# Altium PCB Yukitora_Mezanine.PcbDoc (part 1 of 2)
Units mm, origin at the board's own origin, x right, y up, seen from the top; angles counter-clockwise.
Board outline 67.05 x 88.93 mm, 2 copper layers (Top Layer, Bottom Layer); 83 components, 77 nets, 528 pads, 27 vias.
Unrouted connection lines stored in the file: 137.
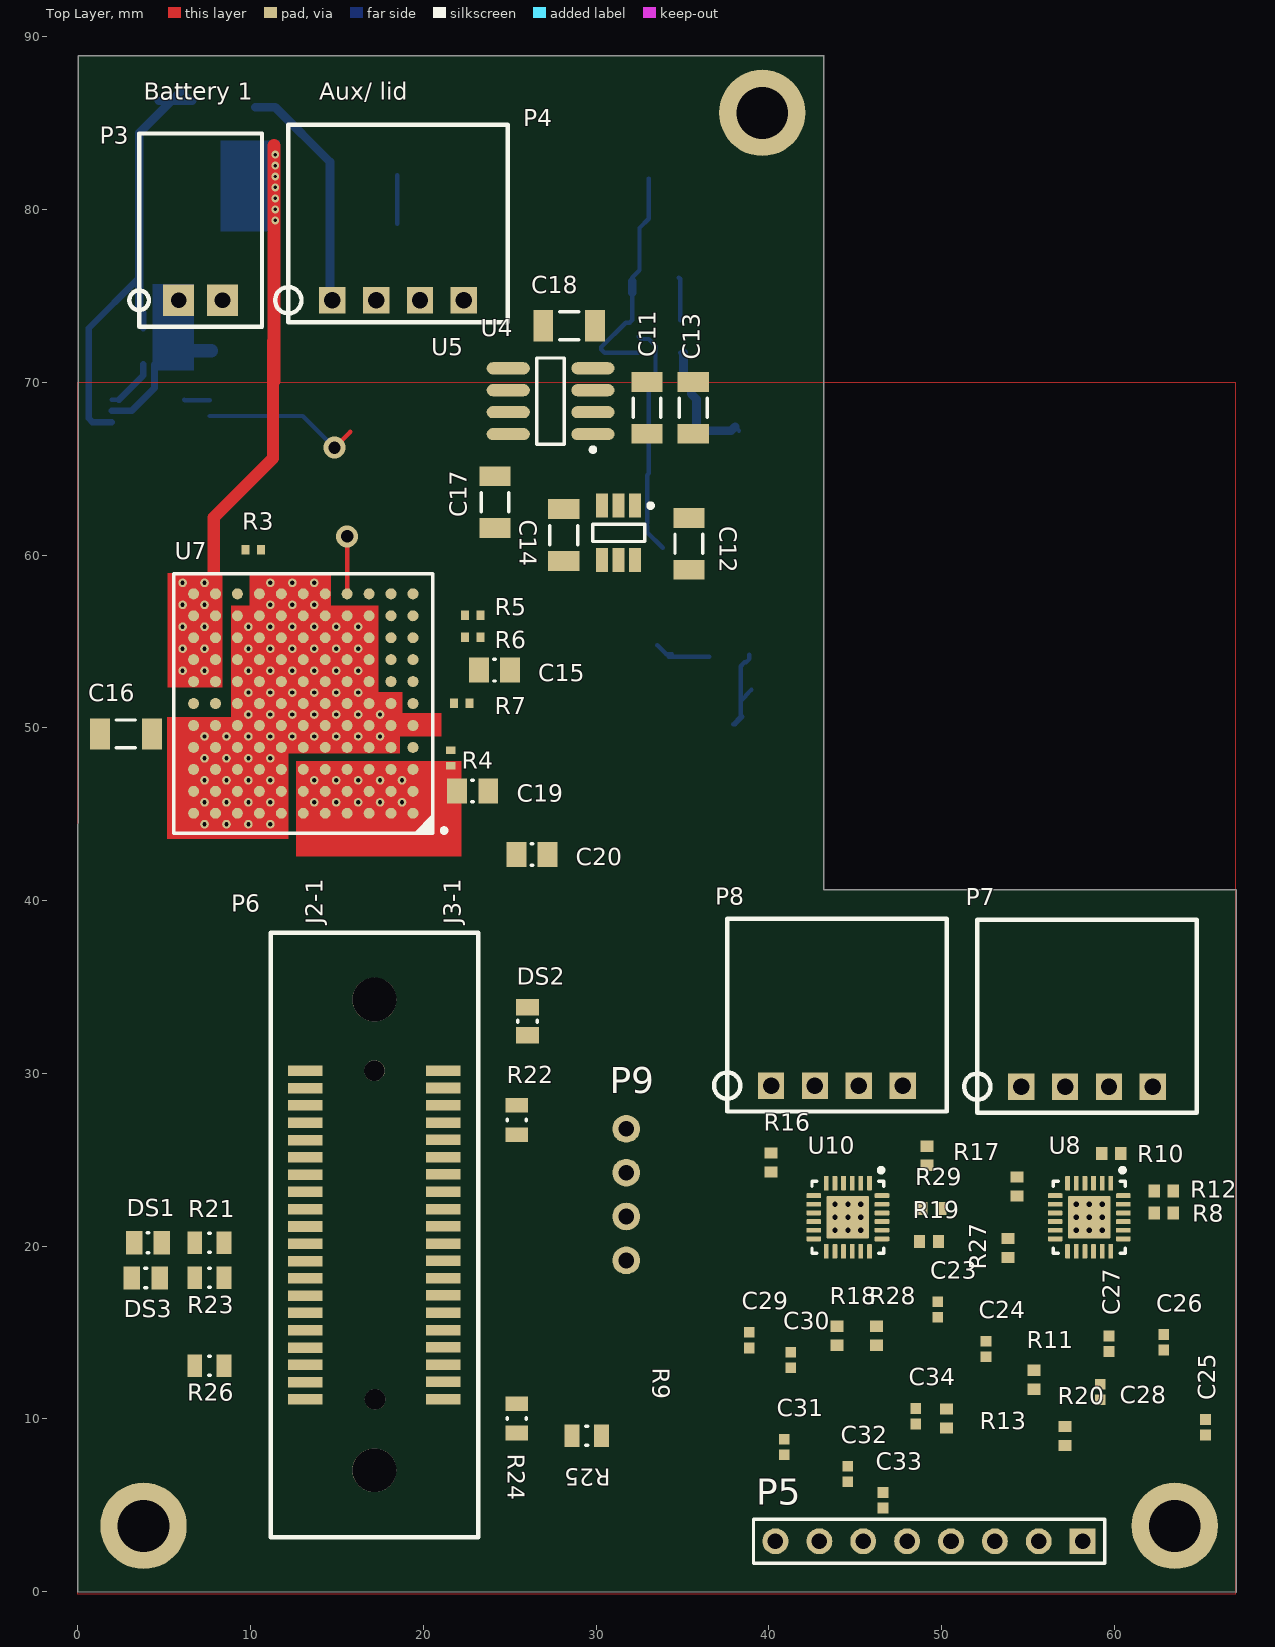
[diagram p0: Top Layer view]
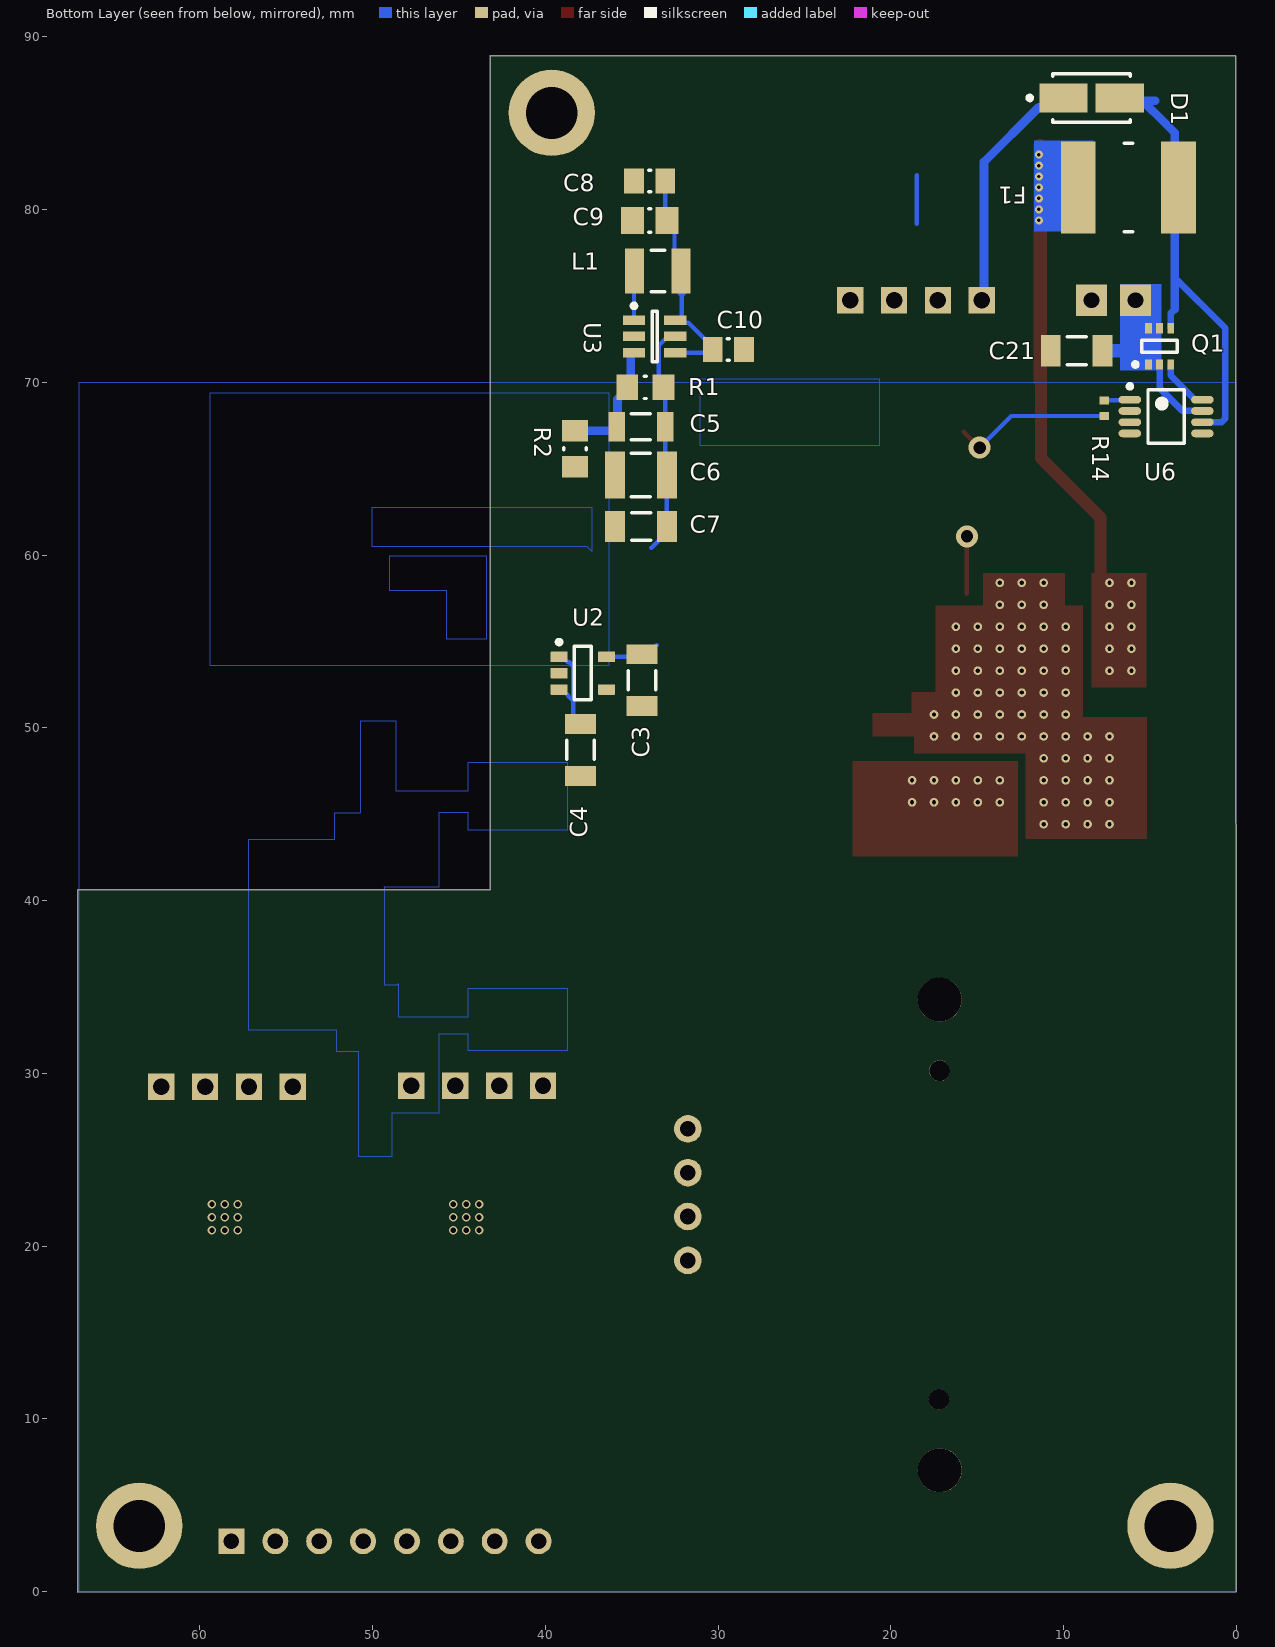
[diagram p1: Bottom Layer view, seen from below]

## Layer stack, top to bottom
Top Solder: solder mask 0.0102, Solder Resist, Dk 3.5
Top Layer: signal copper 0.0356
Dielectric 1: dielectric 0.32, FR-4, Dk 4.8
Bottom Layer: signal copper 0.0356
Bottom Solder: solder mask 0.0102, Solder Resist, Dk 3.5

## Board outline
43.18,88.9 43.18,40.64 67.056,40.64 67.056,-0.025 0.007,0 0.039,88.899

## Design rules (kind name [scope] priority, off if disabled: settings)
Clearance Clearance_2 [InNamedPolygon('NONET_L02_P014')] p1: gap=0.076 ignorepadtopadclearanceinfootprint=FALSE except(0: Arc-Hole Track-Hole SMDPad-Hole THPad-Hole Via-Hole Fill-Hole Poly-Hole Region-Hole Text-Hole; 0.254: Arc-Text Track-Text SMDPad-Text THPad-Text Via-Text Fill-Text Poly-Text Region-Text Text-Text)
Clearance Clearance_1 [InNamedPolygon('NONET_L01_P002')] p2: gap=0.127 ignorepadtopadclearanceinfootprint=FALSE
Clearance [All] p3: gap=0.2 ignorepadtopadclearanceinfootprint=TRUE except(0.1: SMDPad-SMDPad)
HoleSize [All] p1: absolutevalues=TRUE maxlimit=5 minlimit=0.025 maxpercent=80.000 minpercent=20.000
MinimumSolderMaskSliver [All] p1: minsoldermaskwidth=0.037
PlaneConnect [All] p1: planeconnectstyle=Direct reliefexpansion=0.508 reliefentries=4 reliefconductorwidth=0.254 reliefairgap=0.254
PolygonConnect [All] p1: connectstyle=Relief reliefconductorwidth=0.254 reliefentries=4 polygonreliefangle="90 Angle" airgapwidth=0.254
RoomDefinition 36V_Supply [InComponentClass('36V_Supply')] p1: confinementstyle=ConfineIn formatcopy=TRUE lockcomponents=FALSE outline 40.831,58.539 40.831,84.066 26.324,84.066 26.324,58.539
RoomDefinition "Stepper Motor Driver" [InComponentClass('Stepper Motor Driver')] p2: confinementstyle=ConfineIn formatcopy=TRUE lockcomponents=FALSE outline 32.004,-0.127 67.056,-0.127 67.056,41.681 32.004,41.681
RoomDefinition Bluetooth [InComponentClass('Bluetooth')] p3: confinementstyle=ConfineIn formatcopy=TRUE lockcomponents=FALSE outline 0.381,0 31.115,0 31.115,45.72 0.381,45.72
RoomDefinition 5V_Supply_Alt_1 [InComponentClass('5V_Supply_Alt_1')] p4: confinementstyle=ConfineIn formatcopy=TRUE lockcomponents=FALSE outline 19.841,56.845 40.579,56.845 40.579,77.292 19.841,77.292
RoutingVias [All] p1: holewidth=0.711 width=1.27 viastyle="Through Hole" minholewidth=0.711 minwidth=1.27 maxholewidth=0.711 maxwidth=1.27
SilkToSilkClearance [All] p1: silktosilkclearance=0.2
SilkToSolderMaskClearance [IsPad] p1: minsilkscreentomaskgap=0.175 clearancetoexposedcopper=TRUE
SolderMaskExpansion [All] p1: expansion=0.102
Width [All] p1: maxlimit=1 minlimit=0.127 preferedwidth=0.254
25 further rules are at their usual default settings.

## Classes and differential pairs
component class "Stepper Motor Driver": C23 C24 C25 C26 C27 C28 C29 C30 C31 C32 C33 C34 P7 P8 R8 R9 R10 R11 R12 R13 R16 R17 R18 R19 R20 R27 R28 R29 U8 U10
component class Bluetooth: DS1 DS2 DS3 P6 R21 R22 R23 R24 R25 R26
component class 12_Supply: C15 C19 C20 R3 R4 R5 R6 R7 U7
component class 5V_Supply_Alt_1: C11 C12 C13 C14 C17 C18 U4 U5
component class Power_Input_FET: C16 C21 D1 F1 P3 P4 Q1 R14 RL2 RL? U6
component class 36V_Supply: C5 C6 C7 C8 C9 C10 L1 R1 R2 U3
component class Connectors: C3 C4 P1 P2 P5 P9 U2

## Components (designator, comment, footprint, x,y, rotation, side; value= is the part's Value field where it differs from the comment)
C3 "CAP CER 1UF 50V X7R 1210" CAPC1206(3216)130_N 34.398,52.762 r90 bottom
C4 "CAP CER 1UF 50V X7R 1210" CAPC1206(3216)130_N 37.954,48.722 r90 bottom
C5 "22pF" CAPC1206(3216)170_L 34.463,67.429 r180 bottom
C6 "CAP CER 1UF 50V X7R 1210" CAPC1210(3225)100_N 34.463,64.635 r180 bottom
C7 "CAP CER 0.47UF 50V X7R 1206" CAPC1206(3216)190_N 34.456,61.654 r180 bottom
C8 "CAP CER 1UF 16V X7R 0805" CAPC0805(2012)145_N 33.955,81.653 r180 bottom
C9 "4.7uF" CAPC0805(2012)145_M 33.955,79.367 r180 bottom
C10 "CAP CER 0.047UF 16V X7R 0603" CAPC0805(2012)145_N 29.407,71.899 r0 bottom
C11 "CAP CER 10UF 6.3V X5R 1206" CAPC1206(3216)130_N 32.959,68.529 r270 top
C12 "CAP CER 10UF 6.3V X5R 1206" CAPC1206(3216)130_N 35.372,60.655 r90 top
C13 "CAP CER 1UF 50V X7R 1210" CAPC1206(3216)130_N 35.626,68.529 r270 top
C14 "CAP CER 1UF 10V X5R 0805" CAPC1206(3216)130_N 28.133,61.163 r90 top
C15 "CAP CER 0.1UF 16V X7R 0805" CAPC0805(2012)145_N 24.13,53.34 r0 top
C16 "CAP CER 10UF 6.3V X5R 1206" CAPC1206(3216)130_N 2.794,49.657 r180 top
C17 "1uF" CAPC1206(3216)130_N 24.159,63.068 r90 top
C18 "CAP CER 1UF 50V X7R 1210" CAPC1206(3216)130_N 28.448,73.279 r0 top
C19 "CAP CER 0.1UF 16V X7R 0805" CAPC0805(2012)145_N 22.86,46.355 r180 top
C20 "CAP CER 0.1UF 16V X7R 0805" CAPC0805(2012)145_N 26.289,42.672 r0 top
C21 "CAP CER 10UF 6.3V X5R 1206" CAPC1206(3216)130_N 9.246,71.831 r180 bottom
C23 ".01uF" CAPC0402(1005)60_N 49.784,16.341 r90 top
C24 "2.2uF" CAPC0402(1005)60_N 52.578,14.055 r90 top
C25 "10uF" CAPC0402(1005)60_N 65.278,9.525 r90 top
C26 ".01uF" CAPC0402(1005)60_N 62.865,14.436 r90 top
C27 ".01uF" CAPC0402(1005)60_N 59.69,14.351 r90 top
C28 "10uF" CAPC0402(1005)60_N 59.182,11.557 r90 top
C29 ".01uF" CAPC0402(1005)60_N 38.862,14.563 r90 top
C30 "2.2uF" CAPC0402(1005)60_N 41.275,13.42 r90 top
C31 "10uF" CAPC0402(1005)60_N 40.894,8.382 r90 top
C32 ".01uF" CAPC0402(1005)60_N 44.577,6.816 r90 top
C33 ".01uF" CAPC0402(1005)60_N 46.609,5.292 r90 top
C34 "10uF" CAPC0402(1005)60_N 48.514,10.16 r90 top
D1 "CDBA540-HF" VISH-DO-214AC-2_M 8.382,86.462 r180 bottom
DS1 "Lite-On LTST-S220KGKT Green LED, 571 nm 2012 (0805) Side View, Rectangle Lens SMD package" 0805C_L 4.064,20.193 r0 top
DS2 "Lite-On LTST-S220KGKT Green LED, 571 nm 2012 (0805) Side View, Rectangle Lens SMD package" 0805C_L 26.035,33.02 r90 top
DS3 "Lite-On LTST-S220KGKT Green LED, 571 nm 2012 (0805) Side View, Rectangle Lens SMD package" 0805C_L 3.937,18.161 r0 top
F1 "PCT" CAPC7451X12N 6.248,81.28 r0 bottom
L1 "47uH" C1210 33.481,76.454 r0 bottom
P1 "TLW-108-05-G-D" TLW-108-05-G-D 105.994,15.748 r90 top
P2 "TLW-108-05-G-D" TLW-108-05-G-D 116.027,13.132 r270 bottom
P3 "IPL1-102-01-F-S-RA-K" IPL1-102-01-F-S-RA-K 5.842,74.752 r0 top
P4 "IPL1-104-01-L-S-RA-K" IPL1-104-01-L-S-RA-K 14.732,74.752 r0 top
P5 "Header 8" HDR1X8 58.166,2.921 r180 top
P6 "FSI-120-03-G-D-E-AB" FSI-120-03-G-D-E-AB 17.17,20.65 r90 top
P7 "IPL1-104-01-L-S-RA-K" IPL1-104-01-L-S-RA-K 54.61,29.235 r0 top
P8 "IPL1-104-01-L-S-RA-K" IPL1-104-01-L-S-RA-K 40.132,29.295 r0 top
P9 "TLW-104-05-G-S" TLW-104-05-G-S 31.75,22.987 r90 top
Q1 "MCH6336-TL-E" ONSC-MCPH-6_V 4.445,72.085 r90 bottom
R1 "RES SMD 280K OHM 1% 1/8W 0805" RESC0805(2012)_M 34.209,69.715 r0 bottom
R2 "RES SMD 10K OHM 1% 1/8W 0805" RESC0805(2012)_M 38.273,66.159 r270 bottom
R3 "???" RESC0402(1005)_L 10.16,60.325 r0 top
R4 "???" RESC0402(1005)_L 21.59,48.26 r90 top
R5 "100k" RESC0402(1005)_L 22.86,56.515 r0 top
R6 "11k" RESC0402(1005)_L 22.86,55.245 r180 top
R7 "34k" RESC0402(1005)_L 22.225,51.435 r180 top
R8 "10k" RESC0402(1005)_M 62.865,21.929 r0 top
R9 "0.1R" RESC0402(1005)_M 54.356,23.453 r90 top
R10 "0.1R" RESC0402(1005)_M 59.817,25.358 r0 top
R11 "47K" RESC0402(1005)_M 55.347,12.268 r90 top
R12 "47K" RESC0402(1005)_M 62.865,23.199 r0 top
R13 "1" RESC0402(1005)_M 50.292,10.033 r270 top
R14 "560k" RESC0402(1005)_L 7.645,68.504 r270 bottom
R16 "0.1R" RESC0402(1005)_M 40.132,24.85 r90 top
R17 "0.1R" RESC0402(1005)_M 49.149,25.231 r90 top
R18 "47K" RESC0402(1005)_M 43.942,14.817 r90 top
R19 "47K" RESC0402(1005)_M 49.276,20.278 r180 top
R20 "1" RESC0402(1005)_M 57.15,9.017 r90 top
R21 "3.9k" RESC0805(2012)_L 7.62,20.193 r180 top
R22 "3.9k" RESC0805(2012)_L 25.4,27.305 r90 top
R23 "3.9k" RESC0805(2012)_L 7.62,18.161 r180 top
R24 "10K" RESC0805(2012)_L 25.4,10.033 r270 top value=3.9k
R25 "100" RESC0805(2012)_L 29.464,9.017 r180 top value=3.9k
R26 "100" RESC0805(2012)_L 7.62,13.081 r0 top value=3.9k
R27 "47K" RESC0402(1005)_M 53.848,19.897 r90 top
R28 "47K" RESC0402(1005)_M 46.228,14.817 r90 top
R29 "10K" RESC0402(1005)_M 49.403,22.183 r180 top
U2 "TLV70233DBVR" DBV0005A_N 37.827,53.167 r180 bottom
U3 "LT3461" LT-S6-6-TSOT-23_N 33.665,72.655 r180 bottom
U4 "LT1763CS8-5#PBF" LT-S8-8_M 27.371,68.91 r180 top
U5 "LTC1983ES6-5#TRMPBF" SOT95P323X100-6N 31.308,61.29 r270 top
U6 "LTC4414EMS8#TRPBF" LT-MS8-8_L 4.064,68.021 r180 bottom
U7 "LTM8055IY" LT-BGA-121-15000X15000X4920 13.056,51.41 r180 top
U8 "DRV8834RGER" RGE0024B_V 58.547,21.675 r270 top
U10 "DRV8834RGER" RGE0024B_V 44.577,21.675 r270 top

## Footprints (in the part's own frame and the unit in brackets; to place one, negate y for a bottom-side part, rotate by r counter-clockwise, add the part's x,y. Pads: shape width x height; smd on the part's side, far side on the other; paste and mask are expansions set on the pad)
0805C_L [mm]
  rect 0.95x1.35 smd: 1(-0.8,0) 2(0.8,0)
  silkscreen extent -0.05,-0.58 0.05,0.58, body extent -1.1,-0.72 1.1,0.72, height 0.75
C1210 [mm] "Chip Capacitor, Body 3.2x2.5mm, IPC High Density"
  rect 1.1x2.6 smd: 1(-1.35,0) 2(1.35,0)
  silkscreen extent -0.4,-1.2 0.4,1.2, body extent -1.7,-1.35 1.7,1.35, height 1.3
CAPC0402(1005)60_N [mm] "Chip Capacitor, Body 1.0x0.5mm, Height 0.6mm, IPC Medium Density"
  rect 0.62x0.62 smd: 1(-0.45,0) 2(0.45,0)
  body extent -0.55,-0.3 0.55,0.3, height 0.6
CAPC0805(2012)145_M [mm] "Chip Capacitor, Body 2.0x1.2mm, Height 1.45mm, IPC Low Density"
  rect 1.35x1.55 smd: 1(-1,0) 2(1,0)
  silkscreen extent -0.05,-0.67 0.05,0.68, body extent -1.1,-0.72 1.1,0.72, height 1.45
CAPC0805(2012)145_N [mm] "Chip Capacitor, Body 2.0x1.2mm, Height 1.45mm, IPC Medium Density"
  rect 1.15x1.45 smd: 1(-0.9,0) 2(0.9,0)
  silkscreen extent -0.05,-0.62 0.05,0.62, body extent -1.1,-0.72 1.1,0.73, height 1.45
CAPC1206(3216)130_N [mm] "Chip Capacitor, Body 3.2x1.6mm, Height 1.3mm, IPC Medium Density"
  rect 1.15x1.8 smd: 1(-1.5,0) 2(1.5,0)
  silkscreen extent -0.55,-0.8 0.55,0.8, body extent -1.7,-0.9 1.7,0.9, height 1.3
CAPC1206(3216)170_L [mm] "Chip Capacitor, Body 3.2x1.6mm, Height 1.7mm, IPC High Density"
  rect 0.95x1.7 smd: 1(-1.4,0) 2(1.4,0)
  silkscreen extent -0.55,-0.75 0.55,0.75, body extent -1.7,-0.9 1.7,0.9, height 1.7
CAPC1206(3216)190_N [mm] "Chip Capacitor, Body 3.2x1.6mm, Height 1.9mm, IPC Medium Density"
  rect 1.15x1.8 smd: 1(-1.5,0) 2(1.5,0)
  silkscreen extent -0.55,-0.8 0.55,0.8, body extent -1.7,-0.9 1.7,0.9, height 1.9
CAPC1210(3225)100_N [mm] "Chip Capacitor, Body 3.2x2.5mm, Height 1mm, IPC Medium Density"
  rect 1.15x2.7 smd: 1(-1.5,0) 2(1.5,0)
  silkscreen extent -0.55,-1.25 0.55,1.25, body extent -1.7,-1.35 1.7,1.35, height 1
CAPC7451X12N [mm] "Chip Capacitor, 2-Leads, Body 7.36x5.12mm, IPC Medium Density"
  rect 2x5.3 smd: 1(-2.9,0) 2(2.9,0)
  silkscreen extent -0.25,-2.55 0.25,2.55, body extent -3.99,-2.72 3.99,2.72, height 1.25
DBV0005A_N [mm] "SOT23, 5-Leads, Body 3.05x1.75mm, Pitch 0.95mm, IPC Medium Density"
  rrect17% 1x0.6 smd: 1(-1.375,0.95) 2(-1.375,0) 3(-1.375,-0.95) 4(1.375,-0.95) 5(1.375,0.95)
  silkscreen extent -1.5,-1.55 0.5,1.92, body extent -1.42,-1.46 1.42,1.46, height 1.08
FSI-120-03-G-D-E-AB [mil]
  round 100 hole 100: hole(-536.2,0) hole(536.2,0)
  round 47 hole 47: hole(-374.3,-1.6) hole(374.3,0)
  rect 24x78.74 smd: J2-1(373.91,157.36) J2-2(334.51,157.36) J2-3(295.11,157.36) J2-4(255.71,157.36) J2-5(216.31,157.36) J2-6(176.91,157.36) J2-7(137.51,157.36) J2-8(98.11,157.36) J2-9(58.71,157.36) J2-10(19.31,157.36) J2-11(-20.09,157.36) J2-12(-59.49,157.36) J2-13(-98.89,157.36) J2-14(-138.29,157.36) J2-15(-177.69,157.36) J2-16(-217.09,157.36) J2-17(-256.49,157.36) J2-18(-295.89,157.36) J2-19(-335.29,157.36) J2-20(-374.69,157.36) J3-1(374.3,-157.36) J3-2(334.9,-157.36) J3-3(295.5,-157.36) J3-4(256.1,-157.36) J3-5(216.7,-157.36) J3-6(177.3,-157.36) J3-7(137.9,-157.36) J3-8(98.5,-157.36) J3-9(59.1,-157.36) J3-10(19.7,-157.36) J3-11(-19.7,-157.36) J3-12(-59.1,-157.36) J3-13(-98.5,-157.36) J3-14(-137.9,-157.36) J3-15(-177.3,-157.36) J3-16(-216.7,-157.36) J3-17(-256.1,-157.36) J3-18(-295.5,-157.36) J3-19(-334.9,-157.36) J3-20(-374.3,-157.36)
  silkscreen extent -689,-236 689,236, body extent -633,-179 710,188, height 162
HDR1X8 [mm] "Connector; Header; 8 Position"
  rect 1.5x1.5 hole 0.9: 1(0,0)
  round 1.5 hole 0.9: 2(2.54,0) 3(5.08,0) 4(7.62,0) 5(10.16,0) 6(12.7,0) 7(15.24,0) 8(17.78,0)
  silkscreen extent -1.27,-1.27 19.05,1.27
IPL1-102-01-F-S-RA-K [mm] ".100 TERMINAL ASSEMBLY"
  rect 1.8x1.8 hole 0.91: 1(0,0) 2(2.54,0)
  silkscreen extent -2.85,-1.52 4.83,9.65, body extent -2.03,-0.25 4.57,9.4, height 6.56
IPL1-104-01-L-S-RA-K [mil]
  rect 60x60 hole 37.4: 1(0,0) 2(100,0) 3(200,0) 4(300,0)
  silkscreen extent -130,-50 400,400, body extent -80,-12 380,380, height 258
LT-BGA-121-15000X15000X4920 [mm] "BGA, 121-Balls, Body 15x15mm, Pitch 1.27mm"
  round 0.635 smd: A1(-6.35,6.35) A2(-5.08,6.35) A3(-3.81,6.35) A4(-2.54,6.35) A5(-1.27,6.35) A6(0,6.35) A7(1.27,6.35) A8(2.54,6.35) A9(3.81,6.35) A10(5.08,6.35) A11(6.35,6.35) B1(-6.35,5.08) B2(-5.08,5.08) B3(-3.81,5.08) B4(-2.54,5.08) B5(-1.27,5.08) B6(0,5.08) B7(1.27,5.08) B8(2.54,5.08) B9(3.81,5.08) B10(5.08,5.08) B11(6.35,5.08) C1(-6.35,3.81) C2(-5.08,3.81) C3(-3.81,3.81) C4(-2.54,3.81) C5(-1.27,3.81) C6(0,3.81) C7(1.27,3.81) C8(2.54,3.81) C9(3.81,3.81) C10(5.08,3.81) C11(6.35,3.81) D1(-6.35,2.54) D2(-5.08,2.54) D3(-3.81,2.54) D4(-2.54,2.54) D5(-1.27,2.54) D6(0,2.54) D7(1.27,2.54) D8(2.54,2.54) D9(3.81,2.54) D10(5.08,2.54) D11(6.35,2.54) E1(-6.35,1.27) E2(-5.08,1.27) E3(-3.81,1.27) E4(-2.54,1.27) E5(-1.27,1.27) E6(0,1.27) E7(1.27,1.27) E8(2.54,1.27) E9(3.81,1.27) E10(5.08,1.27) E11(6.35,1.27) F1(-6.35,0) F2(-5.08,0) F3(-3.81,0) F4(-2.54,0) F5(-1.27,0) F6(0,0) F7(1.27,0) F8(2.54,0) F9(3.81,0) F10(5.08,0) F11(6.35,0) G1(-6.35,-1.27) G2(-5.08,-1.27) G3(-3.81,-1.27) G4(-2.54,-1.27) G5(-1.27,-1.27) G6(0,-1.27) G7(1.27,-1.27) G8(2.54,-1.27) G9(3.81,-1.27) G10(5.08,-1.27) G11(6.35,-1.27) H1(-6.35,-2.54) H2(-5.08,-2.54) H3(-3.81,-2.54) H4(-2.54,-2.54) H5(-1.27,-2.54) H6(0,-2.54) H7(1.27,-2.54) H8(2.54,-2.54) H9(3.81,-2.54) H10(5.08,-2.54) H11(6.35,-2.54) J1(-6.35,-3.81) J2(-5.08,-3.81) J3(-3.81,-3.81) J4(-2.54,-3.81) J5(-1.27,-3.81) J6(0,-3.81) J7(1.27,-3.81) J8(2.54,-3.81) J9(3.81,-3.81) J10(5.08,-3.81) J11(6.35,-3.81) K1(-6.35,-5.08) K2(-5.08,-5.08) K3(-3.81,-5.08) K4(-2.54,-5.08) K5(-1.27,-5.08) K6(0,-5.08) K7(1.27,-5.08) K8(2.54,-5.08) K9(3.81,-5.08) K10(5.08,-5.08) K11(6.35,-5.08) L1(-6.35,-6.35) L2(-5.08,-6.35) L3(-3.81,-6.35) L4(-2.54,-6.35) L5(-1.27,-6.35) L6(0,-6.35) L7(1.27,-6.35) L8(2.54,-6.35) L9(3.81,-6.35) L10(5.08,-6.35) L11(6.35,-6.35)
  silkscreen extent -8.27,-7.5 7.5,7.5, body extent -7.5,-7.5 7.5,7.5, height 5.12
LT-MS8-8_L [mm] "SOP, 8-Leads, Body 3.1x3.1mm, Pitch 0.65mm, IPC High Density"
  oval 1.3x0.45 smd: 1(-2.1,0.975) 2(-2.1,0.325) 3(-2.1,-0.325) 4(-2.1,-0.975) 5(2.1,-0.975) 6(2.1,-0.325) 7(2.1,0.325) 8(2.1,0.975)
  silkscreen extent -2.23,-1.55 1.05,1.87, body extent -1.55,-1.55 1.55,1.55, height 1.1
LT-S6-6-TSOT-23_N [mm] "SOT23, 6-Leads, Body 2.9x1.75mm, Pitch 0.95mm, IPC Medium Density"
  rect 1.3x0.55 smd: 1(-1.2,0.95) 2(-1.2,0) 3(-1.2,-0.95) 4(1.2,-0.95) 5(1.2,0) 6(1.2,0.95)
  silkscreen extent -1.33,-1.45 0.15,1.9, body extent -0.87,-1.45 0.87,1.45, height 1
LT-S8-8_M [mm] "SOIC, 8-Leads, Body 4.9x3.9mm, Pitch 1.27mm, IPC Low Density"
  oval 2.5x0.7 smd: 1(-2.45,1.905) 2(-2.45,0.635) 3(-2.45,-0.635) 4(-2.45,-1.905) 5(2.45,-1.905) 6(2.45,-0.635) 7(2.45,0.635) 8(2.45,1.905)
  silkscreen extent -2.58,-2.5 0.8,2.93, body extent -2,-2.5 2,2.5, height 1.76
ONSC-MCPH-6_V [mm] "SOT23, 6-Leads, Body 2x1.6mm, Pitch 0.65mm"
  rect 0.6x0.4 smd: 1(-1.05,0.65) 2(-1.05,0) 3(-1.05,-0.65) 4(1.05,-0.65) 5(1.05,0) 6(1.05,0.65)
  silkscreen extent -1.17,-1.03 0.35,1.53, body extent -0.8,-1 0.8,1, height 0.9
RESC0402(1005)_L [mm] "Chip Resistor, Body 1.0x0.5mm, IPC High Density"
  rect 0.45x0.55 smd: 1(-0.45,0) 2(0.45,0)
  body extent -0.52,-0.27 0.53,0.28, height 0.4
RESC0402(1005)_M [mm] "Chip Resistor, Body 1.0x0.5mm, IPC Low Density"
  rect 0.65x0.75 smd: 1(-0.55,0) 2(0.55,0)
  body extent -0.52,-0.28 0.53,0.28, height 0.4
RESC0805(2012)_L [mm] "Chip Resistor, Body 2.0x1.3mm, IPC High Density"
  rect 0.85x1.3 smd: 1(-0.85,0) 2(0.85,0)
  silkscreen extent -0.05,-0.55 0.05,0.55, body extent -1.1,-0.67 1.1,0.68, height 0.7
RESC0805(2012)_M [mm] "Chip Resistor, Body 2.0x1.3mm, IPC Low Density"
  rect 1.25x1.5 smd: 1(-1.05,0) 2(1.05,0)
  silkscreen extent -0.05,-0.65 0.05,0.65, body extent -1.1,-0.67 1.1,0.67, height 0.7
RGE0024B_V [mm] "QFN, 24-Leads, Body 4x4mm, Pitch 0.5mm, Thermal Pad 2.45x2.45mm"
  rrect36% 0.85x0.28 smd paste-0.025 mask+0.07: 1(-1.975,1.25) 2(-1.975,0.75) 3(-1.975,0.25) 4(-1.975,-0.25) 5(-1.975,-0.75) 6(-1.975,-1.25) 13(1.975,-1.25) 14(1.975,-0.75) 15(1.975,-0.25) 16(1.975,0.25) 17(1.975,0.75) 18(1.975,1.25)
  rrect36% 0.28x0.85 smd paste-0.025 mask+0.07: 7(-1.25,-1.975) 8(-0.75,-1.975) 9(-0.25,-1.975) 10(0.25,-1.975) 11(0.75,-1.975) 12(1.25,-1.975) 19(1.25,1.975) 20(0.75,1.975) 21(0.25,1.975) 22(-0.25,1.975) 23(-0.75,1.975) 24(-1.25,1.975)
  rrect4% 2.45x2.45 smd paste-3 mask+0.07: 25(0,0)
  silkscreen extent -2.85,-2.07 2.07,2.07, body extent -2,-2 2,2, height 1
SOT95P323X100-6N [mm] "SOT23, 6-Leads, Body 2.90x3.23mm, Pitch 0.95mm, IPC Medium Density"
  rect 1.4x0.7 smd: 1(-1.575,0.95) 2(-1.575,0) 3(-1.575,-0.95) 4(1.575,-0.95) 5(1.575,0) 6(1.575,0.95)
  silkscreen extent -1.7,-1.5 0.5,1.98, body extent -1.92,-1.5 1.92,1.5, height 1
TLW-104-05-G-S [mm]
  round 1.6 hole 0.91: 1(-3.81,0) 2(-1.27,0) 3(1.27,0) 4(3.81,0)
  body extent -5.08,-1.27 5.08,1.22, height 2.51
TLW-108-05-G-D [mm]
  round 1.5 hole 0.91: 1(-8.89,-1.27) 2(-8.89,1.27) 3(-6.35,-1.27) 4(-6.35,1.27) 5(-3.81,-1.27) 6(-3.81,1.27) 7(-1.27,-1.27) 8(-1.27,1.27) 9(1.27,-1.27) 10(1.27,1.27) 11(3.81,-1.27) 12(3.81,1.27) 13(6.35,-1.27) 14(6.35,1.27) 15(8.89,-1.27) 16(8.89,1.27)
  silkscreen extent -10.16,-2.54 10.16,2.54, body extent -10.16,-2.51 10.16,2.51, height 6.35
VISH-DO-214AC-2_M [mm] "DO-214AC, 2-Leads, Body 4.5x2.79mm, IPC Low Density"
  rect 2.8x1.7 smd: 1(-1.625,0) 2(1.625,0)
  silkscreen extent -3.7,-1.4 2.25,1.4, body extent -2.25,-1.39 2.25,1.4, height 2.29

## Part data
C3 C4: library part CMP-1037-04913-1, Capacitance=1µF, Manufacturer="Murata Electronics North America", Manufacturer Part Number=GRM32RR71H105KA01L, Operating Temperature="-55°C ~ 125°C", Package / Case="1210 (3225 Metric)", Ratings=-, Supplier Part Number 1=490-1863-6-ND, Temperature Coefficient=X7R, Tolerance=±10%, Voltage - Rated=50V, Applications="General Purpose", Category=Capacitors, ComponentLink1Description=http://search.murata.co.jp/Ceramy/image/img/A01X/G101/ENG/GRM32RR71H105KA01-01.pdf, ComponentLink1URL=http://search.murata.co.jp/Ceramy/image/img/A01X/G101/ENG/GRM32RR71H105KA01-01.pdf, Features=-, Height - Seated (Max)=-, Lead Spacing=-, Lead Style=-, Mounting Type="Surface Mount, MLCC", Packaging=Digi-Reel®, Part Status=Active, Pricing 1="1=0.35, 10=0.242, 100=0.1449, 500=0.10868 (USD)", RoHS="RoHS Compliant", Size / Dimension="0.126\" L x 0.098\" W (3.20mm x 2.50mm)", Stock 1=66890, Supplier 1=Digi-Key, Thickness (Max)="0.079\" (2.00mm)"
C5: library part CMP-1037-04573-1, "CAP CER 22PF 50V C0G/NP0 1206", Manufacturer=KEMET, Manufacturer Part Number=C1206C220K5GACTU, Operating Temperature="-55°C ~ 125°C", Package / Case="1206 (3216 Metric)", Ratings=-, Supplier Part Number 1=399-8165-1-ND, Temperature Coefficient="C0G, NP0", Tolerance=±10%, Voltage - Rated=50V, Applications="General Purpose", Category=Capacitors, ComponentLink1Description=http://www.kemet.com/docfinder?Partnumber=C1206C220K2GACTU, ComponentLink1URL=http://www.kemet.com/docfinder?Partnumber=C1206C220K2GACTU, Failure Rate=-, Features="Low ESL", Height - Seated (Max)=-, Lead Spacing=-, Lead Style=-, Mounting Type="Surface Mount, MLCC", Packaging="Cut Tape (CT)", Part Status=Active, Pricing 1="1=0.18, 10=0.128, 100=0.06, 500=0.04208, 1000=0.03483 (USD)", RoHS="RoHS Compliant", Size / Dimension="0.126\" L x 0.063\" W (3.20mm x 1.60mm)", Stock 1=35613, Supplier 1=Digi-Key, Thickness (Max)="0.035\" (0.88mm)"
C6: library part CMP-1038-01123-1, Capacitance=1µF, Manufacturer="Taiyo Yuden", Manufacturer Part Number=UMK325B7105KH-T, Operating Temperature="-55°C ~ 125°C", Package / Case="1210 (3225 Metric)", Ratings=-, Supplier Part Number 1=587-1366-1-ND, Temperature Coefficient=X7R, Tolerance=±10%, Voltage - Rated=50V, Applications="General Purpose", Category=Capacitors, ComponentLink1Description=http://www.yuden.co.jp/productdata/catalog/en/mlcc_all_e.pdf, ComponentLink1URL=http://www.yuden.co.jp/productdata/catalog/en/mlcc_all_e.pdf, Features=-, Height - Seated (Max)=-, Lead Spacing=-, Lead Style=-, Mounting Type="Surface Mount, MLCC", Packaging="Cut Tape (CT)", Part Status=Active, Pricing 1="1=0.36, 10=0.247, 100=0.1398, 500=0.0987, 1000=0.08637 (USD)", RoHS="RoHS Compliant", Size / Dimension="0.126\" L x 0.098\" W (3.20mm x 2.50mm)", Stock 1=23864, Supplier 1=Digi-Key, Thickness (Max)="0.063\" (1.60mm)"
C7: library part CMP-1037-04570-1, Capacitance=0.47µF, Manufacturer="Taiyo Yuden", Manufacturer Part Number=UMK316B7474KL-T, Operating Temperature="-55°C ~ 125°C", Package / Case="1206 (3216 Metric)", Ratings=-, Supplier Part Number 1=587-1325-1-ND, Temperature Coefficient=X7R, Tolerance=±10%, Voltage - Rated=50V, Applications="General Purpose", Category=Capacitors, ComponentLink1Description=http://www.yuden.co.jp/productdata/catalog/en/mlcc_all_e.pdf, ComponentLink1URL=http://www.yuden.co.jp/productdata/catalog/en/mlcc_all_e.pdf, Features=-, Height - Seated (Max)=-, Lead Spacing=-, Lead Style=-, Mounting Type="Surface Mount, MLCC", Packaging="Cut Tape (CT)", Part Status=Active, Pricing 1="1=0.3, 10=0.203, 100=0.115, 500=0.08114, 1000=0.071 (USD)", RoHS="RoHS Compliant", Size / Dimension="0.126\" L x 0.063\" W (3.20mm x 1.60mm)", Stock 1=8658, Supplier 1=Digi-Key, Thickness (Max)="0.071\" (1.80mm)"
C8: library part CMP-1036-04795-1, Capacitance=1µF, Manufacturer="Taiyo Yuden", Manufacturer Part Number=EMK212B7105KG-T, Operating Temperature="-55°C ~ 125°C", Package / Case="0805 (2012 Metric)", Ratings=-, Supplier Part Number 1=587-1283-1-ND, Temperature Coefficient=X7R, Tolerance=±10%, Voltage - Rated=16V, Applications="General Purpose", Category=Capacitors, ComponentLink1Description=http://ds.yuden.co.jp/TYCOMPAS/ut/detail.do?productNo=EMK212B7105KG-T&fileName=EMK212B7105KG-T_SS&mode=specSheetDownload, ComponentLink1URL=http://ds.yuden.co.jp/TYCOMPAS/ut/detail.do?productNo=EMK212B7105KG-T&fileName=EMK212B7105KG-T_SS&mode=specSheetDownload, Features=-, Height - Seated (Max)=-, Lead Spacing=-, Lead Style=-, Mounting Type="Surface Mount, MLCC", Packaging="Cut Tape (CT)", Part Status=Active, Pricing 1="1=0.13, 10=0.089, 100=0.042, 1000=0.02439 (USD)", RoHS="RoHS Compliant", Size / Dimension="0.079\" L x 0.049\" W (2.00mm x 1.25mm)", Stock 1=41495, Supplier 1=Digi-Key, Thickness (Max)="0.053\" (1.35mm)"
C9: library part CMP-1036-04750-1, "CAP CER 4.7UF 16V X7R 0805", Manufacturer=KEMET, Manufacturer Part Number=C0805C475K4RACTU, Operating Temperature="-55°C ~ 125°C", Package / Case="0805 (2012 Metric)", Ratings=-, Supplier Part Number 1=399-7415-1-ND, Temperature Coefficient=X7R, Tolerance=±10%, Voltage - Rated=16V, Applications="General Purpose", Category=Capacitors, ComponentLink1Description=http://www.kemet.com/docfinder?Partnumber=C0805C475K4RACTU, ComponentLink1URL=http://www.kemet.com/docfinder?Partnumber=C0805C475K4RACTU, Failure Rate=-, Features="Low ESL", Height - Seated (Max)=-, Lead Spacing=-, Lead Style=-, Mounting Type="Surface Mount, MLCC", Packaging="Cut Tape (CT)", Part Status=Active, Pricing 1="1=0.26, 10=0.176, 100=0.0894, 500=0.06118, 1000=0.05412 (USD)", RoHS="RoHS Compliant", Size / Dimension="0.079\" L x 0.049\" W (2.00mm x 1.25mm)", Stock 1=88820, Supplier 1=Digi-Key, Thickness (Max)="0.055\" (1.40mm)"
C10: library part CMP-1036-04795-1, Capacitance=0.047µF, Manufacturer="Murata Electronics North America", Manufacturer Part Number=GRM188R71C473KA01D, Operating Temperature="-55°C ~ 125°C", Package / Case="0603 (1608 Metric)", Ratings=-, Supplier Part Number 1=490-1529-6-ND, Temperature Coefficient=X7R, Tolerance=±10%, Voltage - Rated=16V, Applications="General Purpose", Category=Capacitors, ComponentLink1Description=http://www.murata.com/~/media/webrenewal/support/library/catalog/products/capacitor/mlcc/c02e.ashx, ComponentLink1URL=http://www.murata.com/~/media/webrenewal/support/library/catalog/products/capacitor/mlcc/c02e.ashx, Features=-, Height - Seated (Max)=-, Lead Spacing=-, Lead Style=-, Mounting Type="Surface Mount, MLCC", Packaging=Digi-Reel®, Part Status=Active, Pricing 1="1=0.1, 10=0.046, 100=0.0206, 500=0.0147, 1000=0.01155 (USD)", RoHS="RoHS Compliant", Size / Dimension="0.063\" L x 0.031\" W (1.60mm x 0.80mm)", Stock 1=26, Supplier 1=Digi-Key, Thickness (Max)="0.035\" (0.90mm)"
C11 C12: library part CMP-1037-04913-1, Capacitance=10uF, Manufacturer="Taiyo Yuden", Manufacturer Part Number=JMK316BJ106ML-T, Operating Temperature="-55°C ~ 85°C", Package / Case="1206 (3216 Metric)", Ratings=-, Supplier Part Number 1=587-5447-1-ND, Temperature Coefficient=X5R, Tolerance=±20%, Voltage - Rated=6.3V, Applications="SMPS Filtering", Category=Capacitors, ComponentLink1Description=http://ds.yuden.co.jp/TYCOMPAS/ut/detail.do?productNo=JMK316BJ106ML-T&fileName=JMK316BJ106ML-T_SS&mode=specSheetDownload, ComponentLink1URL=http://ds.yuden.co.jp/TYCOMPAS/ut/detail.do?productNo=JMK316BJ106ML-T&fileName=JMK316BJ106ML-T_SS&mode=specSheetDownload, Failure Rate=-, Features=-, Height - Seated (Max)=-, Lead Spacing=-, Lead Style=-, Mounting Type="Surface Mount, MLCC", Notification="Current market demand for these product types have resulted in fluctuating and extending lead times. Lead times may differ.", Packaging="Cut Tape (CT)", Part Status=Active, Pricing 1="1=0.24, 10=0.161, 100=0.0817, 500=0.05592, 1000=0.04946 (USD)", RoHS="RoHS Compliant", Size / Dimension="0.126\" L x 0.063\" W (3.20mm x 1.60mm)", Stock 1=5600, Supplier 1=Digi-Key, Thickness (Max)="0.071\" (1.80mm)"
C13: library part CMP-1037-04913-1, Capacitance=10µF, Manufacturer="Murata Electronics North America", Manufacturer Part Number=GRM32RR71H105KA01L, Operating Temperature="-55°C ~ 125°C", Package / Case="1210 (3225 Metric)", Ratings=-, Supplier Part Number 1=490-1863-6-ND, Temperature Coefficient=X7R, Tolerance=±10%, Voltage - Rated=50V, Applications="General Purpose", Category=Capacitors, ComponentLink1Description=http://search.murata.co.jp/Ceramy/image/img/A01X/G101/ENG/GRM32RR71H105KA01-01.pdf, ComponentLink1URL=http://search.murata.co.jp/Ceramy/image/img/A01X/G101/ENG/GRM32RR71H105KA01-01.pdf, Features=-, Height - Seated (Max)=-, Lead Spacing=-, Lead Style=-, Mounting Type="Surface Mount, MLCC", Packaging=Digi-Reel®, Part Status=Active, Pricing 1="1=0.35, 10=0.242, 100=0.1449, 500=0.10868 (USD)", RoHS="RoHS Compliant", Size / Dimension="0.126\" L x 0.098\" W (3.20mm x 2.50mm)", Stock 1=66890, Supplier 1=Digi-Key, Thickness (Max)="0.079\" (2.00mm)"
C14: library part CMP-1037-04913-1, Capacitance=1µF, Manufacturer="Taiyo Yuden", Manufacturer Part Number=LMK212BJ105MD-T, Operating Temperature="-55°C ~ 85°C", Package / Case="0805 (2012 Metric)", Ratings=-, Supplier Part Number 1=587-4918-1-ND, Temperature Coefficient=X5R, Tolerance=±20%, Voltage - Rated=10V, Applications="SMPS Filtering", Category=Capacitors, ComponentLink1Description=http://ds.yuden.co.jp/TYCOMPAS/ut/detail.do?productNo=LMK212BJ105MD-T&fileName=LMK212BJ105MD-T_SS&mode=specSheetDownload, ComponentLink1URL=http://ds.yuden.co.jp/TYCOMPAS/ut/detail.do?productNo=LMK212BJ105MD-T&fileName=LMK212BJ105MD-T_SS&mode=specSheetDownload, Failure Rate=-, Features=-, Height - Seated (Max)=-, Lead Spacing=-, Lead Style=-, Mounting Type="Surface Mount, MLCC", Notification="Current market demand for these product types have resulted in fluctuating and extending lead times. Lead times may differ.", Packaging="Cut Tape (CT)", Part Status=Active, Pricing 1="1=0.17, 10=0.121, 100=0.0567, 500=0.03976, 1000=0.03291 (USD)", RoHS="RoHS Compliant", Size / Dimension="0.079\" L x 0.049\" W (2.00mm x 1.25mm)", Stock 1=2994, Supplier 1=Digi-Key, Thickness (Max)="0.037\" (0.95mm)"
C15 C19 C20: library part CMP-1036-04795-1, Capacitance=0.1µF, Manufacturer="Murata Electronics North America", Manufacturer Part Number=GRM219R71C104KA01D, Operating Temperature="-55°C ~ 125°C", Package / Case="0805 (2012 Metric)", Ratings=-, Supplier Part Number 1=490-1673-6-ND, Temperature Coefficient=X7R, Tolerance=±10%, Voltage - Rated=25V, Applications="General Purpose", Category=Capacitors, ComponentLink1Description=http://www.murata.com/~/media/webrenewal/support/library/catalog/products/capacitor/mlcc/c02e.ashx, ComponentLink1URL=http://www.murata.com/~/media/webrenewal/support/library/catalog/products/capacitor/mlcc/c02e.ashx, Features=-, Height - Seated (Max)=-, Lead Spacing=-, Lead Style=-, Mounting Type="Surface Mount, MLCC", Packaging=Digi-Reel®, Part Status=Active, Pricing 2="1=0.14, 10=0.098, 100=0.0462, 500=0.0324, 1000=0.02683 (USD)", RoHS="RoHS Compliant", Size / Dimension="0.079\" L x 0.049\" W (2.00mm x 1.25mm)", Stock 2=245331, Supplier 2=Digi-Key, Supplier Part Number 2=490-1683-6-ND, Thickness (Max)="0.053\" (1.35mm)"
C16: library part CMP-1037-04913-1, Capacitance=22pF, Manufacturer="Taiyo Yuden", Manufacturer Part Number=JMK316BJ106ML-T, Operating Temperature="-55°C ~ 85°C", Package / Case="1206 (3216 Metric)", Ratings=-, Supplier Part Number 1=587-5447-1-ND, Temperature Coefficient=X5R, Tolerance=±20%, Voltage - Rated=6.3V, Applications="SMPS Filtering", Category=Capacitors, ComponentLink1Description=http://ds.yuden.co.jp/TYCOMPAS/ut/detail.do?productNo=JMK316BJ106ML-T&fileName=JMK316BJ106ML-T_SS&mode=specSheetDownload, ComponentLink1URL=http://ds.yuden.co.jp/TYCOMPAS/ut/detail.do?productNo=JMK316BJ106ML-T&fileName=JMK316BJ106ML-T_SS&mode=specSheetDownload, Failure Rate=-, Features=-, Height - Seated (Max)=-, Lead Spacing=-, Lead Style=-, Mounting Type="Surface Mount, MLCC", Notification="Current market demand for these product types have resulted in fluctuating and extending lead times. Lead times may differ.", Packaging="Cut Tape (CT)", Part Status=Active, Pricing 1="1=0.24, 10=0.161, 100=0.0817, 500=0.05592, 1000=0.04946 (USD)", RoHS="RoHS Compliant", Size / Dimension="0.126\" L x 0.063\" W (3.20mm x 1.60mm)", Stock 1=5600, Supplier 1=Digi-Key, Thickness (Max)="0.071\" (1.80mm)"
C17: library part CMP-1037-04913-1
C18: library part CMP-1037-04913-1, Capacitance=10000pF, Manufacturer="Murata Electronics North America", Manufacturer Part Number=GRM32RR71H105KA01L, Operating Temperature="-55°C ~ 125°C", Package / Case="1210 (3225 Metric)", Ratings=-, Supplier Part Number 1=490-1863-6-ND, Temperature Coefficient=X7R, Tolerance=±10%, Voltage - Rated=50V, Applications="General Purpose", Category=Capacitors, ComponentLink1Description=http://search.murata.co.jp/Ceramy/image/img/A01X/G101/ENG/GRM32RR71H105KA01-01.pdf, ComponentLink1URL=http://search.murata.co.jp/Ceramy/image/img/A01X/G101/ENG/GRM32RR71H105KA01-01.pdf, Features=-, Height - Seated (Max)=-, Lead Spacing=-, Lead Style=-, Mounting Type="Surface Mount, MLCC", Packaging=Digi-Reel®, Part Status=Active, Pricing 1="1=0.35, 10=0.242, 100=0.1449, 500=0.10868 (USD)", RoHS="RoHS Compliant", Size / Dimension="0.126\" L x 0.098\" W (3.20mm x 2.50mm)", Stock 1=66890, Supplier 1=Digi-Key, Thickness (Max)="0.079\" (2.00mm)"
C21: library part CMP-1037-04913-1, Capacitance=.1uF, Manufacturer="Taiyo Yuden", Manufacturer Part Number=JMK316BJ106ML-T, Operating Temperature="-55°C ~ 85°C", Package / Case="1206 (3216 Metric)", Ratings=-, Supplier Part Number 1=587-5447-1-ND, Temperature Coefficient=X5R, Tolerance=±20%, Voltage - Rated=6.3V, Applications="SMPS Filtering", Category=Capacitors, ComponentLink1Description=http://ds.yuden.co.jp/TYCOMPAS/ut/detail.do?productNo=JMK316BJ106ML-T&fileName=JMK316BJ106ML-T_SS&mode=specSheetDownload, ComponentLink1URL=http://ds.yuden.co.jp/TYCOMPAS/ut/detail.do?productNo=JMK316BJ106ML-T&fileName=JMK316BJ106ML-T_SS&mode=specSheetDownload, Failure Rate=-, Features=-, Height - Seated (Max)=-, Lead Spacing=-, Lead Style=-, Mounting Type="Surface Mount, MLCC", Notification="Current market demand for these product types have resulted in fluctuating and extending lead times. Lead times may differ.", Packaging="Cut Tape (CT)", Part Status=Active, Pricing 1="1=0.24, 10=0.161, 100=0.0817, 500=0.05592, 1000=0.04946 (USD)", RoHS="RoHS Compliant", Size / Dimension="0.126\" L x 0.063\" W (3.20mm x 1.60mm)", Stock 1=5600, Supplier 1=Digi-Key, Thickness (Max)="0.071\" (1.80mm)"
C23 C24 C25 C26 C27 C28 C29 C30 C31 C32 C33 C34: library part CMP-1034-01365-1, "CAP 220pF 25V ±10% 0402 (1005 Metric) Thickness 0.6mm SMD"
D1: library part "D Schottky", "DIODE SCHOTTKY 40V 5A DO214AB", Capacitance @ Vr, F="380pF @ 4V, 1MHz", Current - Average Rectified (Io)=5A, Manufacturer="Comchip Technology", Operating Temperature - Junction="-50°C ~ 150°C", Package / Case="DO-214AC, SMA", Supplier Device Package="DO-214AC (SMA)", Supplier Part Number 1=641-1707-6-ND, Category="Discrete Semiconductor Products", ComponentLink1Description=http://www.comchiptech.com/cms/UserFiles/CDBA540-HF%20Thru505315.%20CDBA5200-HF%20RevC.pdf, ComponentLink1URL=http://www.comchiptech.com/cms/UserFiles/CDBA540-HF%20Thru505315.%20CDBA5200-HF%20RevC.pdf, Diode Type=Schottky, Manufacturer Part Number=CDBA540-HF, Mounting Type="Surface Mount", Packaging=Digi-Reel®, Part Status=Active, Pricing 1="1=0.49, 10=0.381, 25=0.3208, 100=0.2612, 250=0.2164, 500=0.1791, 1000=0.13432, 2500=0.12313 (USD)", RoHS="RoHS Compliant", Speed="Fast Recovery =< 500ns, > 200mA (Io)", Stock 1=7367, Supplier 1=Digi-Key
DS1 DS2 DS3: library part "LED A/K", Case/Package=0805, Case Code (Metric)=2012, Colour=Green, Forward Current=20mA, Forward Voltage=2V, Lens Colour=Colorless, Manufacturer="Vishay / Lite-On", Manufacturer Part Number=LTST-S220KGKT, Max Operating Temperature=85°C, Min Operating Temperature=-55°C, Package Quantity=4000, Power Dissipation=75W, Power Rating=75mW, Supplier Part Number 1=160-1468-1-ND, Case Code (Imperial)=0805, ComponentLink1Description=https://datasheet.ciiva.com/11775/0900766b80dc0b70-11775441.pdf, ComponentLink1URL=https://datasheet.ciiva.com/11775/0900766b80dc0b70-11775441.pdf, ComponentLink2Description=https://datasheet.ciiva.com/2110/s-110-ltst-s220kgkt-2110069.pdf, ComponentLink2URL=https://datasheet.ciiva.com/2110/s-110-ltst-s220kgkt-2110069.pdf, ComponentLink3Description=https://datasheet.ciiva.com/2110/s-110-ltst-s220kgkt-2110070.pdf, ComponentLink3URL=https://datasheet.ciiva.com/2110/s-110-ltst-s220kgkt-2110070.pdf, ComponentLink4Description=https://datasheet.ciiva.com/12400/100-ltst-s220kgkt-59602-12400886.pdf, ComponentLink4URL=https://datasheet.ciiva.com/12400/100-ltst-s220kgkt-59602-12400886.pdf, ComponentLink5Description=https://datasheet.ciiva.com/2110/s-110-ltst-s220kgkt-2110071.pdf, ComponentLink5URL=https://datasheet.ciiva.com/2110/s-110-ltst-s220kgkt-2110071.pdf, ComponentLink6Description=https://datasheet.ciiva.com/16379/ltst-s220kgkt-16379082.pdf, ComponentLink6URL=https://datasheet.ciiva.com/16379/ltst-s220kgkt-16379082.pdf, ComponentLink7Description=http://www.farnell.com/cad/2124774.pdf, ComponentLink7URL=http://www.farnell.com/cad/2124774.pdf, ComponentLink8Description=http://www.farnell.com/datasheets/693084.pdf, ComponentLink8URL=http://www.farnell.com/datasheets/693084.pdf, Depth=0.6mm, Dominant Wavelength=568nm, Height=0.6mm, Illumination Colour=Green, Lead Free="Lead Free", Length=2.1mm, Lens Style=Diffused,Colorless, Lens Transparency=Clear, Luminous Intensity=35mcd, Mount="Surface Mount", Number of Elements=1, Number of LEDs=1, Number of Pins=2, Packaging="Tape and Reel", Pricing 1="1=0.29, 10=0.212, 25=0.1564, 100=0.1117, 250=0.0759, 500=0.067, 1000=0.0525 (USD)", Pricing 2="1=0.325, 10=0.317, 100=0.23, 200=0.228, 400=0.182, 900=0.147, 3000=0.114, 9000=0.107 (GBP)", Radiation Hardening=No, RoHS=YES, Stock 1=74800, Stock 2=2271, Supplier 1=Digi-Key, Supplier 2=Farnell, Supplier Part Number 2=2062310, Test Current=20mA, Viewing Angle=130°, Wavelength=574nm, Width=1mm
L1: library part Inductor, "FIXED IND 47UH 170MA 1.3 OHM SMD", DC Resistance (DCR)="1.69 Ohm Max", Manufacturer="Murata Electronics North America", Manufacturer Part Number=LQH32CN470K23L, Operating Temperature="-40°C ~ 85°C", Package / Case=Nonstandard, Q @ Freq=-, Supplier Device Package=1210, Supplier Part Number 1=490-2497-1-ND, Tolerance=±10%, Category="Inductors, Coils, Chokes", ComponentLink1Description=http://search.murata.co.jp/Ceramy/image/img/P02/JELF243A-0039.pdf, ComponentLink1URL=http://search.murata.co.jp/Ceramy/image/img/P02/JELF243A-0039.pdf, Height - Seated (Max)="0.067\" (1.70mm)", Material - Core=Ferrite, Mounting Type="Surface Mount", Packaging="Cut Tape (CT)", Part Status=Active, Pricing 1="1=0.33, 10=0.297, 100=0.2043, 500=0.17458, 1000=0.13372 (USD)", Ratings=-, RoHS="RoHS Compliant", Shielding=Unshielded, Size / Dimension="0.126\" L x 0.098\" W (3.20mm x 2.50mm)", Stock 1=1058, Supplier 1=Digi-Key, Type=Wirewound
P1 P2: "CONN HEADER .100\" 16POS DL GOLD", Current Rating="5.2A per Contact", Insulation Color=Black, Manufacturer="Samtec Inc.", Material Flammability Rating=-, Operating Temperature="-55°C ~ 125°C", Supplier Part Number 1=SAM1094-08-ND, Applications=-, Category="Connectors, Interconnects", ComponentLink1Description=http://suddendocs.samtec.com/prints/tlw-mkt.pdf, ComponentLink1URL=http://suddendocs.samtec.com/prints/tlw-mkt.pdf, Connector Type=Header, Contact Finish - Mating=Gold, Contact Finish - Post=Gold, Contact Finish Thickness - Mating="10µin (0.25µm)", Contact Finish Thickness - Post=Flash, Contact Length - Mating="0.105\" (2.67mm)", Contact Length - Post="0.170\" (4.32mm)", Contact Material="Phosphor Bronze", Contact Shape=Square, Contact Type="Male Pin", Fastening Type=Push-Pull, Features=-, Ingress Protection=-, Insulation Height="0.060\" (1.52mm)", Insulation Material="Liquid Crystal Polymer (LCP)", Manufacturer Part Number=TLW-108-05-G-D, Mated Stacking Heights=-, Mounting Type="Through Hole", Number of Positions=16, Number of Positions Loaded=All, Number of Rows=2, Overall Contact Length="0.335\" (8.51mm)", Packaging=Bulk, Part Status=Active, Pitch - Mating="0.100\" (2.54mm)", Pricing 1="1=4.48, 10=4.006, 100=3.2987, 500=2.60756, 1000=2.23842, 5000=2.04207, 10000=1.96353 (USD)", RoHS="RoHS Compliant", Row Spacing - Mating="0.100\" (2.54mm)", Shrouding=Unshrouded, Stock 1=0, Style="Board to Board or Cable", Supplier 1=Digi-Key, Termination=Solder, Voltage Rating=-
P4: Current Rating=-, Insulation Color=Natural, Manufacturer="Samtec Inc.", Material Flammability Rating="UL94 V-0", Operating Temperature="-55°C ~ 125°C", Supplier Part Number 1=SAM9597-ND, Voltage Rating="675VAC, 954VDC", Applications=-, Category="Connectors, Interconnects", ComponentLink1Description=http://suddendocs.samtec.com/prints/ipl1-1xx-xx-xxx-s-xx-x-xx-mkt.pdf, ComponentLink1URL=http://suddendocs.samtec.com/prints/ipl1-1xx-xx-xxx-s-xx-x-xx-mkt.pdf, Connector Type=Header, Contact Finish - Mating=Gold, Contact Finish - Post=Tin, Contact Finish Thickness - Mating="10µin (0.25µm)", Contact Finish Thickness - Post=-, Contact Length - Mating="0.215\" (5.46mm)", Contact Length - Post="0.085\" (2.16mm)", Contact Material="Phosphor Bronze", Contact Shape=Square, Contact Type="Male Pin", Fastening Type="Locking Ramp", Features=-, Ingress Protection=-, Insulation Height="0.240\" (6.10mm)", Insulation Material="Liquid Crystal Polymer (LCP)", Manufacturer Part Number=IPL1-104-01-L-S-RA-K, Mated Stacking Heights=-, Mounting Type="Through Hole, Right Angle", Number of Positions=4, Number of Positions Loaded=All, Number of Rows=1, Overall Contact Length=-, Packaging=Tube, Part Status=Active, Pitch - Mating="0.100\" (2.54mm)", Pricing 1="1=2.53, 10=2.424, 100=2.02, 500=1.717, 1000=1.4645, 5000=1.313 (USD)", RoHS="RoHS Compliant", Row Spacing - Mating=-, Shrouding="Shrouded - 4 Wall", Stock 1=265, Style="Board to Cable/Wire", Supplier 1=Digi-Key, Termination=Solder
P5: "Header, 8-Pin", LatestRevisionDate=17-Jul-2002, LatestRevisionNote="Re-released for DXP Platform.", Publisher="Altium Limited"
P7 P8: Supplier Part Number 1=SAM9597-ND, Supplier 1=Digi-Key
P9: Supplier Part Number 1=MTLW-104-05-G-S-185-ND, Supplier 1=Digi-Key
Q1: library part CMP-1058-00598-1, "P-Channel Power MOSFET, -12 V, -5 A, 43 mOhm, Single, 6-Pin MCPH, Pb-Free, Tape and Reel", Manufacturer="On Semiconductor", Package Type="SC-88FL / MCPH-6", Channel Polarity="P Channel", Ciss Typ (pF)=660, ComponentLink1Description="Manufacturer URL", ComponentLink1URL=http://www.onsemi.com/, ComponentLink2Description=Datasheet, ComponentLink2URL=http://www.onsemi.cn/pub_link/Collateral/MCH6336-D.PDF, ComponentLink3Description="Package Specification", ComponentLink3URL=http://www.onsemi.com/pub_link/Collateral/ENA1601-D.PDF, Configuration=Single, Coss Typ (pF)=210, Crss Typ (pF)=155, ID Max (A)=5, Mounting Technology="Surface Mount", PackageDescription="6-Pin Small Outline Transistor, Body 2 x 1.6 mm, Pitch 0.65 mm", PackageReference=MCPH-6, Packing="Tape and Reel", PartNumber=MCH6336-TL-E, PD Max (W)=1.5, RoHS=Pb-Free, V(BR)DSS Min (V)=12, VGS(th) Max (V)=1.4, VGS Max (V)=10
R1: library part CMP-1013-00017-1, Manufacturer="Vishay Dale", Manufacturer Part Number=CRCW0805280KFKEA, Operating Temperature="-55°C ~ 155°C", Package / Case="0805 (2012 Metric)", Power (Watts)="0.125W, 1/8W", Resistance (Ohms)=280k, Supplier Device Package=0805, Supplier Part Number 1=541-280KCTR-ND, Temperature Coefficient=±100ppm/°C, Tolerance=±1%, Category=Resistors, ComponentLink1Description=http://www.vishay.com/docs/20035/dcrcwe3.pdf, ComponentLink1URL=http://www.vishay.com/docs/20035/dcrcwe3.pdf, Composition="Thick Film", Failure Rate=-, Features="Automotive AEC-Q200", Height - Seated (Max)="0.020\" (0.50mm)", Packaging="Tape & Reel (TR)", Part Status=Active, Pricing 1="5000=0.00546, 10000=0.00474, 25000=0.00417, 50000=0.00382, 125000=0.00375 (USD)", RoHS="RoHS Compliant", Size / Dimension="0.079\" L x 0.049\" W (2.00mm x 1.25mm)", Stock 1=10000, Supplier 1=Digi-Key
R2: library part CMP-1013-00017-1, Manufacturer=Yageo, Manufacturer Part Number=RC0805FR-0710KL, Operating Temperature="-55°C ~ 155°C", Package / Case="0805 (2012 Metric)", Power (Watts)="0.125W, 1/8W", Resistance (Ohms)=10k, Supplier Device Package=0805, Supplier Part Number 1=311-10.0KCRCT-ND, Temperature Coefficient=±100ppm/°C, Tolerance=±1%, Category=Resistors, ComponentLink1Description=http://www.yageo.com/documents/recent/PYu-RC_Group_51_RoHS_L_7.pdf, ComponentLink1URL=http://www.yageo.com/documents/recent/PYu-RC_Group_51_RoHS_L_7.pdf, Composition="Thick Film", Failure Rate=-, Features="Moisture Resistant", Height - Seated (Max)="0.024\" (0.60mm)", Packaging="Cut Tape (CT)", Part Status=Active, Pricing 1="1=0.1, 10=0.022, 100=0.0088, 1000=0.00396, 2500=0.00344 (USD)", RoHS="RoHS Compliant", Size / Dimension="0.079\" L x 0.049\" W (2.00mm x 1.25mm)", Stock 1=13336570, Supplier 1=Digi-Key
R3 R4 R5 R6 R7 R14: library part CMP-1011-00927-1, Supplier Device Package=0402, Supplier Part Number 1=YAG3220CT-ND, Temperature Coefficient=±100ppm/°C, Tolerance=±1%
R8 R9 R10 R11 R12 R13 R16 R17 R18 R19 R20 R27 R28 R29: library part CMP-1011-00463-1
R21 R22 R23 R24 R25 R26: library part CMP-1013-00215-1, "2R55 0.125W 1% 0805 (2012 Metric)  SMD", Case-EIA=0805, Case-Metric=2012, Power="0.125 W", Tolerance="1 %", Technology=SMT
U2: library part CMP-0394-00528-2, "Single Output LDO, 300 mA, Fixed 3.3 V Output, 2 to 5.5 V Input, with Low IQ, 5-pin SOT-23 (DBV), -40 to 125 degC, Green (RoHS & no Sb/Br)", Manufacturer="Texas Instruments", Accuracy(%)=2, Code_JEDEC=MO-178, ComponentLink1Description="Manufacturer URL", ComponentLink1URL=http://www.ti.com/, ComponentLink2Description=Datasheet, ComponentLink2URL=http://www.ti.com/general/docs/lit/getliterature.tsp?genericPartNumber=TLV70233&fileType=pdf, ComponentLink3Description="Package Specification", ComponentLink3URL=http://www.ti.com/litv/pdf/mpds018i, DatasheetVersion=SLVSAG6B, Eco-Plan="Green (RoHS & no Sb/Br)", Fixed Output Options(V)=3.3, Iout(Max)(A)=0.3, Iq(Typ)(mA)=0.03, Mounting Technology="Surface Mount", PackageDescription="5-Pin Plastic Small Outline, Body 1.60 Ã— 2.90 mm, Pitch 0.95 mm", PackageReference=DBV0005A, PackageVersion=4073253-4/K, PartNumber=TLV70233DBVR, SubFamily="Single Channel LDO", Vdo(Typ)(mV)=220, Vin(Max)(V)=5.5, Vin(Min)(V)=2, Vout Adj(Max)(V)=3.3, Vout Adj(Min)(V)=3.3
U3: library part CMP-0491-01698-1, "IC REG BOOST ADJ 0.3A TSOT23-6", Current - Output="300mA (Switch)", Frequency - Switching=3MHz, Manufacturer 1="Linear Technology", Manufacturer Part Number 1=LT3461AES6#TRMPBF, Operating Temperature="0°C ~ 70°C (TA)", Package / Case="SOT-23-6 Thin, TSOT-23-6", Supplier Device Package=TSOT-23-6, Supplier Part Number 1=LT3461AES6#TRMPBFCT-ND, Voltage - Input (Max)=16V, Voltage - Input (Min)=2.5V, Voltage - Output (Max)=38V, Voltage - Output (Min/Fixed)=1.255V, Category 1="Integrated Circuits (ICs)", ComponentLink1Description=http://www.linear.com/docs/3469, ComponentLink1URL=http://www.linear.com/docs/3469, Description 1="IC REG BOOST ADJ 0.3A TSOT23-6", Function=Step-Up, Mounting Type="Surface Mount", Number of Outputs=1, Output Configuration=Positive, Output Type=Adjustable, Packaging="Cut Tape (CT)", Part Status=Active, Pricing 1="1=3.94, 25=3.52, 100=2.4, 250=2.2 (USD)", RoHS 1="RoHS Compliant", Stock 1=1325, Supplier 1=Digi-Key, Synchronous Rectifier=No, Topology=Boost
U4: library part CMP-0476-01685-1, "500 mA, Low Noise, LDO Micropower Regulator, 1.8 to 20 V Vin, 5 V Vout, 8-pin SOIC (S8-8), -40 to 125 degC, Pb-Free", Dropout Voltage(V)=0.3, Manufacturer="Linear Technology", Output Voltage="5 V", Shutdown Current(uA)=1, ComponentLink1Description="Manufacturer URL", ComponentLink1URL=http://www.linear.com/, ComponentLink2Description=Datasheet, ComponentLink2URL=http://cds.linear.com/docs/en/datasheet/1763fg.pdf, ComponentLink3Description="Package Specification", ComponentLink3URL=http://cds.linear.com/docs/en/packaging/05081610_G_SO8.pdf, DatasheetVersion="Rev. G", Discrete Pass Element=no, Iout(mA)=500, Isupply(mA)=0.03, Mounting Technology="Surface Mount", Noise(uV)=20, Number of Outputs=1, PackageDescription="8-Pin Plastic Small Outline (Narrow .150 Inch), Body 4.9 x 3.9 mm, Pitch 1.27 mm", PackageReference=S8-8, PackageVersion="Rev. G, 03/2012", PartNumber=LT1763CS8-5#PBF, PSRR(dB)=65, RoHS=TRUE, Vin Max(V)=20, Vin Min(V)=1.8
U5: Base Part Number=LTC1983-5, Current - Output=100mA, Frequency - Switching=900kHz, Manufacturer="Linear Technology/Analog Devices", Operating Temperature="-40°C ~ 85°C (TA)", Package / Case="SOT-23-6 Thin, TSOT-23-6", Supplier Device Package=TSOT-23-6, Supplier Part Number 1=LTC1983ES6-5#TRMPBFCT-ND, Voltage - Input (Max)=5.5V, Voltage - Input (Min)=2.3V, Voltage - Output (Max)=-, Voltage - Output (Min/Fixed)=-5V, Category="Integrated Circuits (ICs)", ComponentLink1Description=http://www.linear.com/docs/2135, ComponentLink1URL=http://www.linear.com/docs/2135, Function=Step-Down, Manufacturer Part Number=LTC1983ES6-5#TRMPBF, Mounting Type="Surface Mount", Number of Outputs=1, Output Configuration=Negative, Output Type=Fixed, Packaging="Cut Tape (CT)", Part Status=Active, Pricing 1="1=4.36, 25=3.8952, 100=2.3256, 250=2.1318 (USD)", RoHS="RoHS Compliant", Stock 1=17516, Supplier 1=Digi-Key, Synchronous Rectifier=No, Topology="Charge Pump"
U6: library part CMP-0479-00214-1, "Low Loss PowerPath Controller for Large PFET, 3 to 36 V Vin, 8-pin SOP (MS8-8), -40 to 85 degC, Pb-Free, Tape and Reel", Manufacturer="Linear Technology", ComponentLink1Description="Manufacturer URL", ComponentLink1URL=http://www.linear.com/, ComponentLink2Description=Datasheet, ComponentLink2URL=http://cds.linear.com/docs/en/datasheet/4414fc.pdf, ComponentLink3Description="Package Specification", ComponentLink3URL=http://cds.linear.com/docs/en/packaging/05081660_G_MS8.pdf, DatasheetVersion="Rev. C", Ideal Diode="Single, External, P-Channel", Mounting Technology="Surface Mount", PackageDescription="8-Pin Plastic MSOP, Body 3 x 3 mm, Pitch 0.65 mm", PackageReference=MS8-8, PackageVersion="Rev. G, 03/2012", Packing="Tape and Reel", PartNumber=LTC4414EMS8#TRPBF, RoHS=TRUE
U7: library part CMP-2000-06614-1, "Buck-Boost uModule Regulator, 8.5 A, 5 to 36 V, -40 to 125 degC, 121-Ball BGA, RoHS, Tray", Current - Output (Max)=8.5A, Manufacturer=LinearTechnology, Operating Temperature=-40°C~125°C, Package / Case=121-BGA, Package Description="121-Ball BGA, Body 15 x 15 mm, Pitch 1.27 mm", Package Reference=BGA-121, Package Version="Rev. A, 11/2012", Power (Watts) - Manufacture Series=-, Voltage - Input (Max)=36V, Voltage - Input (Min)=5V, Voltage - Output 1=1.2~36V, Applications=ITE(Commercial), Category=PowerSupplies-BoardMount, Datasheet URL=http://cds.linear.com/docs/en/datasheet/8055fa.pdf, Datasheet Version="Rev. A, 01/2016", Efficiency=97.5%, Family=DCDCConverters, Features=OTP, Manufacturer URL=http://www.linear.com/, Mounting Technology=SurfaceMount, Mounting Type=SurfaceMount, Number of Outputs=1, Package URL=http://www.linear.com/docs/41075, Packaging=Tray, PartId=1, Power (Watts) - Max=-, Series=µModule®, Type=Non-IsolatedPoLModule, Voltage - Isolation=-, Voltage - Output 2=-, Voltage - Output 3=-